# Altium PCB Pec.PcbDoc (part 2 of 2)
Units mm, origin at the board's own origin, x right, y up, seen from the top; angles counter-clockwise.
Board outline 94.11 x 61.04 mm, 2 copper layers (Top Layer, Bottom Layer); 131 components, 81 nets, 370 pads, 218 vias.
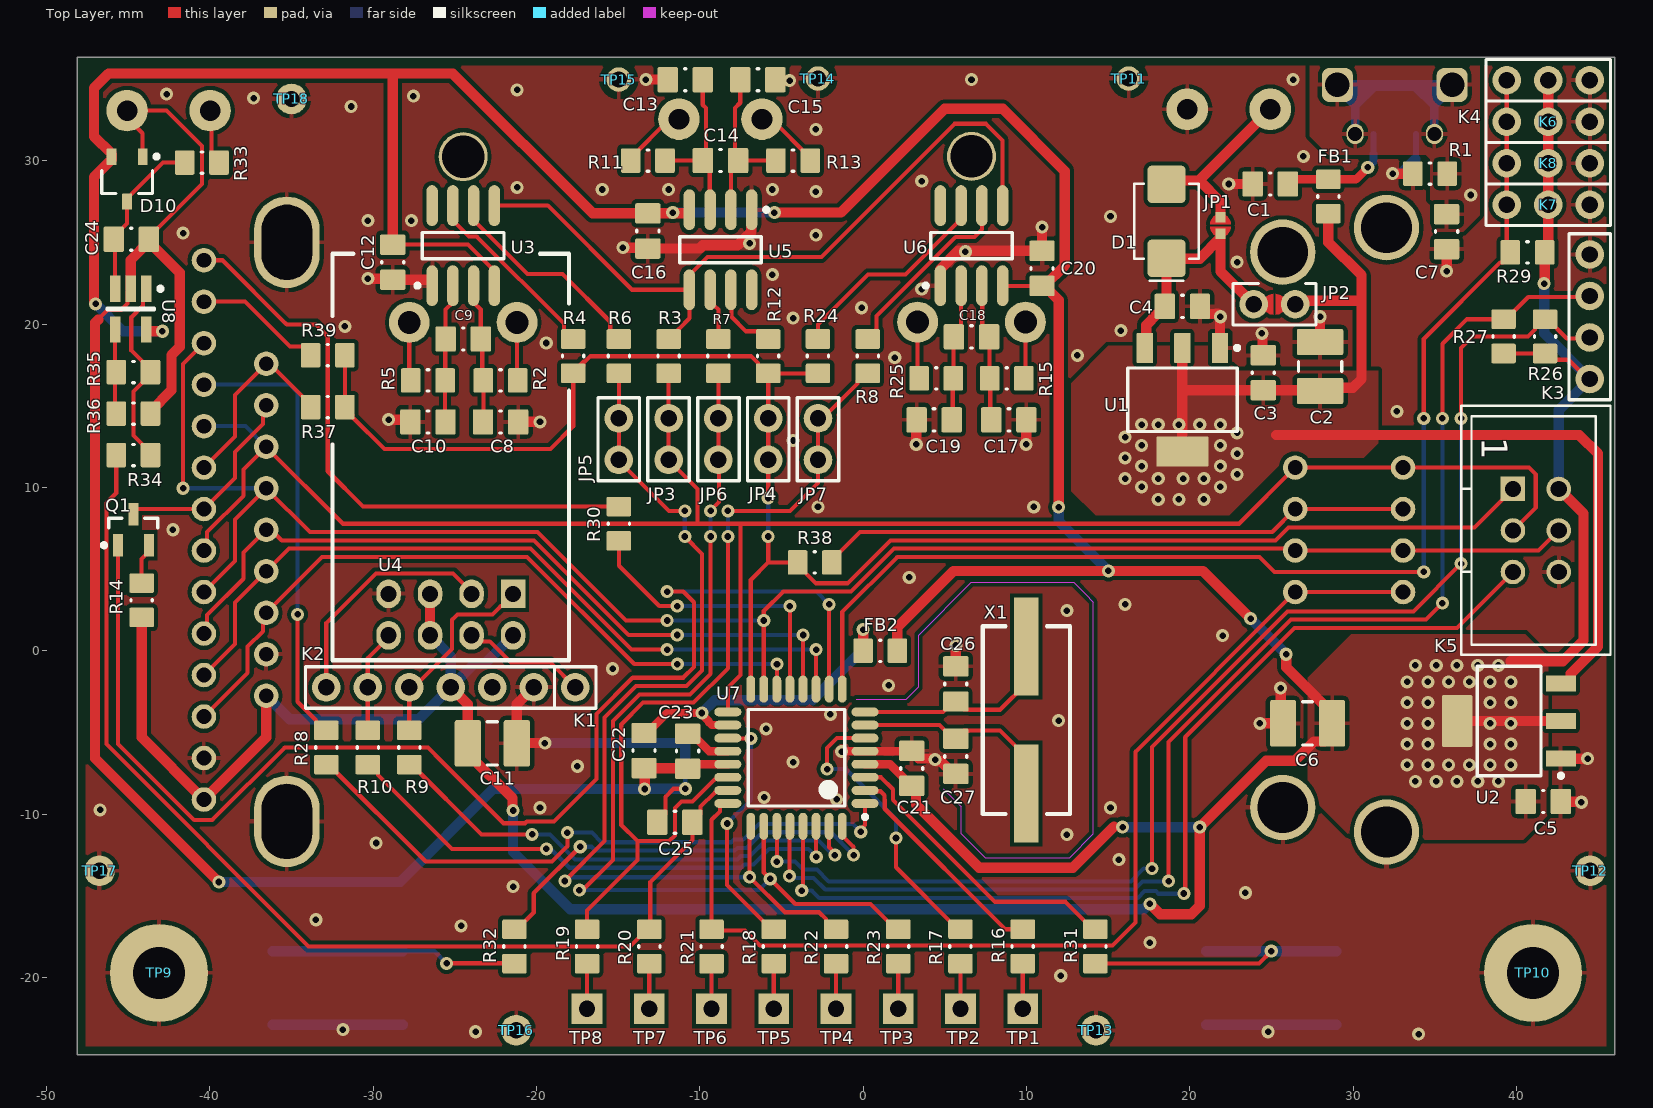
[diagram p0: Top Layer view]

## Polygon pours and split planes (outlines as drawn) (continued)
VCC on Bottom Layer "Bottom Layer-VCC" (solid, pour order 4): 27.212,-1.651 27.212,-8.763 30.006,-11.557 40.42,-11.557 41.944,-10.033 41.944,-0.381 40.547,1.016 29.879,1.016
+5 on Bottom Layer "Bottom Layer-+5" (solid, pour order 2): 15.02,18.669 12.734,16.383 12.734,9.779 14.228,8.285 22.416,8.285 25.942,11.811 30.641,11.811 31.53,12.7 31.53,17.145 30.006,18.669
GND on Top Layer "USB-TOP" (solid, remove dead copper, pour order 10): -48.099,-24.721 -48.099,36.322 46.008,36.322 46.008,-24.721
SHIELD on Top Layer "USB-TOP" (solid, pour order 8): 27.339,36.322 27.339,31.496 28.482,30.353 34.451,30.353 34.705,30.099 34.705,26.035 35.086,25.654 36.737,25.654 37.753,26.67 37.753,36.322
VCC on Top Layer "Top Layer-VCC" (solid, pour order 6): 27.212,-1.651 27.212,-8.763 30.006,-11.557 40.42,-11.557 41.944,-10.033 41.944,-0.381 40.547,1.016 29.879,1.016
+5 on Top Layer "Top Layer-+5" (solid, pour order 0): 15.02,18.669 12.734,16.383 12.734,9.779 14.228,8.285 22.416,8.285 25.942,11.811 30.641,11.811 31.53,12.7 31.53,17.145 22.894,17.145 21.37,18.669

## Keep-outs
Bottom Layer:
  lines w0.025: -0.417,-2.977 -0.677,-2.977 -1.306,-3.606 -1.306,-4.755 -0.798,-5.263 2.631,-5.263 2.921,-5.263 3.123,-5.263 3.717,-5.857 3.717,-7.238 3.95,-7.47 4.917,-8.438
Keep-Out Layer:
  lines w0.025: -0.417,-2.977 2.631,-2.977 3.352,-2.256 3.393,-2.215 3.393,-0.056 3.393,0.96 6.624,4.191 12.892,4.191 13.59,3.493 14.098,2.985 14.098,-11.204 12.647,-12.656 7.468,-12.656 6.016,-11.204 6.016,-9.537 4.917,-8.438

## Silkscreen, mask and mechanical layers (free items; w line width, h text height)
Bottom Overlay:
  text "+" at 25.154,26.9 h1.52
  text "-" at -46.446,26.892 h1.52
  text "-" at 18.554,26.892 h1.52
  text "+" at -40.146,26.8 h1.52
  text "+" at -13.446,26.1 h1.52
  text "-" at -4.746,26.092 h1.52
Board Outline:
  the board outline again, w0.254

## Text inside footprints (layer, text, board x,y; h text height)
J1: Bottom Overlay "+" at -20.292,13.579 h2; Bottom Overlay "-" at -26.892,13.579 h2
J3: Bottom Overlay "-" at 4.408,13.479 h2; Bottom Overlay "+" at 10.908,13.579 h2
K5: Top Overlay "1" at 37.88,13.081 h1.59 r270
LCD1: Bottom Overlay "10" at 31.4,3.1 h1; Bottom Overlay "14" at -41.992,13.279 h1; Bottom Overlay "1" at -34.616,-3.471 h1; Bottom Overlay "1" at -38.392,-9.779 h1
LD1: Bottom Overlay "K" at 10.104,-15.486 h0.8 r90
LD2: Bottom Overlay "K" at 6.294,-15.486 h0.8 r90
LD3: Bottom Overlay "K" at 2.484,-15.486 h0.8 r90
LD4: Bottom Overlay "K" at -1.326,-15.486 h0.8 r90
LD5: Bottom Overlay "K" at -5.136,-15.486 h0.8 r90
LD6: Bottom Overlay "K" at -8.946,-15.486 h0.8 r90
LD7: Bottom Overlay "K" at -12.756,-15.486 h0.8 r90
LD8: Bottom Overlay "K" at -16.566,-15.486 h0.8 r90